# Altium PCB Ball_Dropper.PcbDoc
Units mil, origin at the board's own origin, x right, y up, seen from the top; angles counter-clockwise.
Board outline 6000 x 4000 mil, 2 copper layers (Top Layer, Bottom Layer); 79 components, 83 nets, 409 pads, 399 vias.
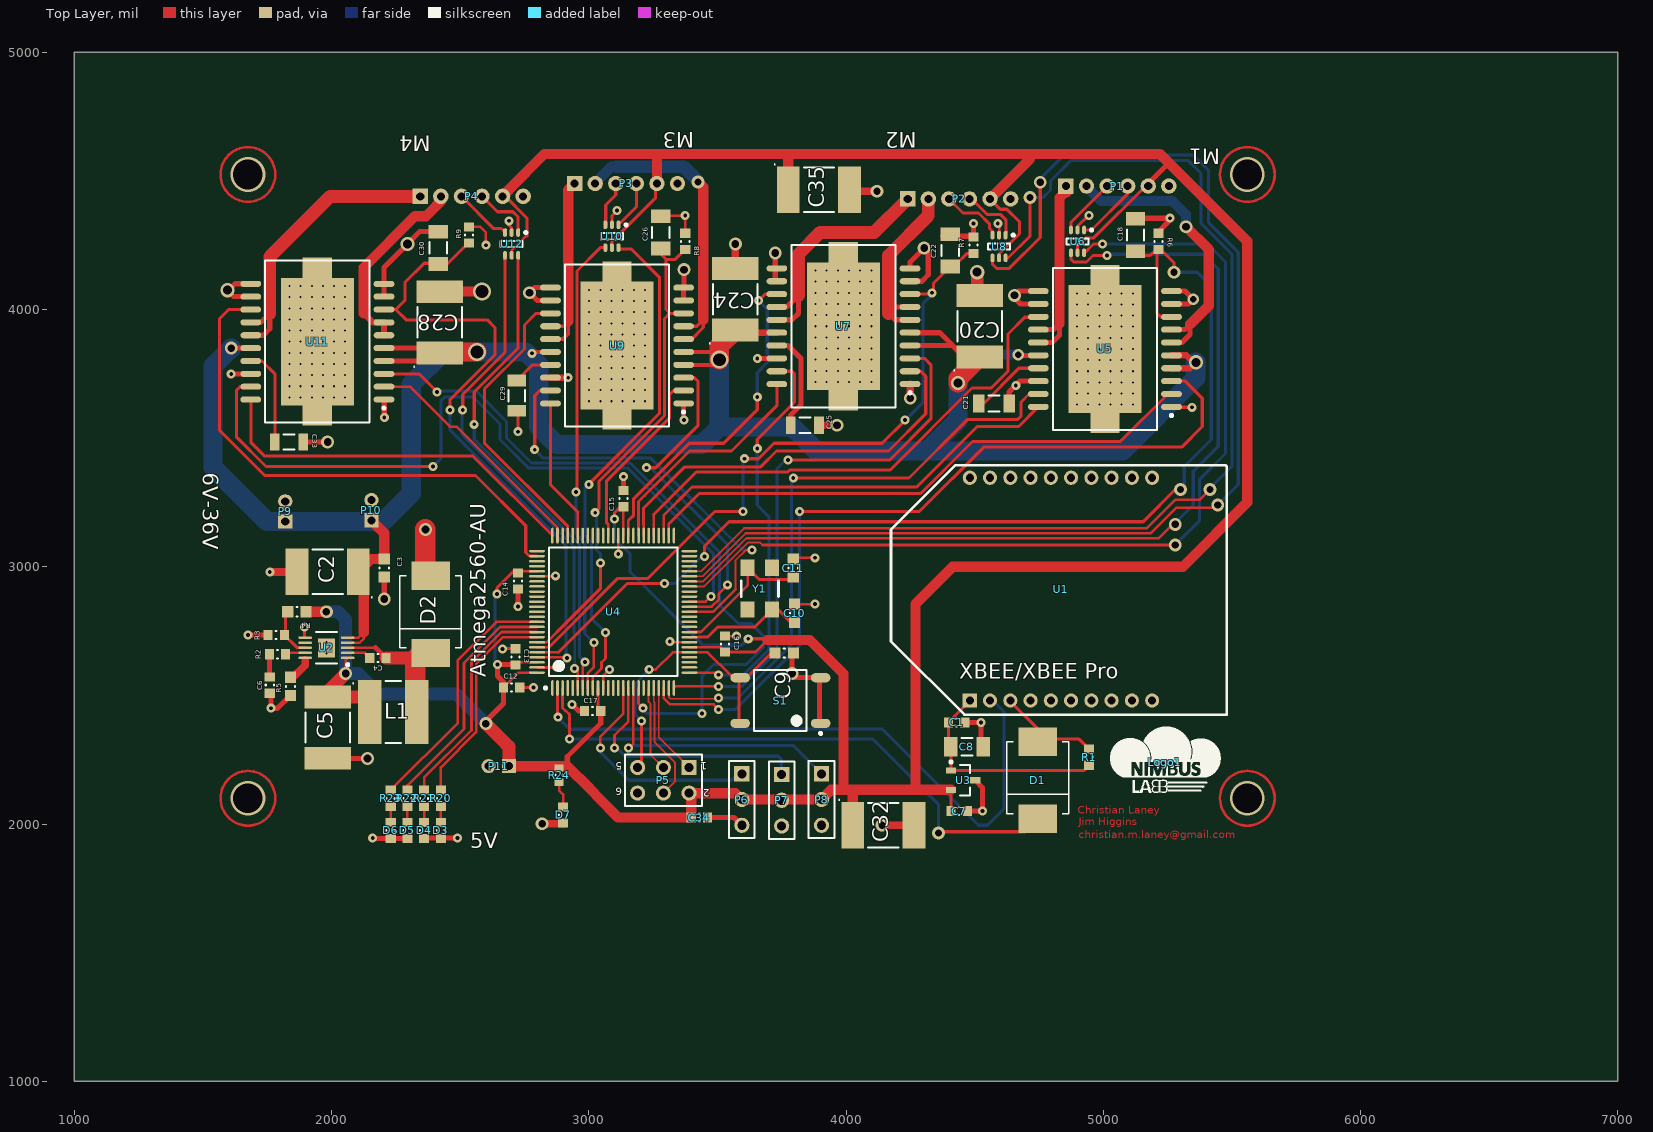
[diagram p0: Top Layer view]
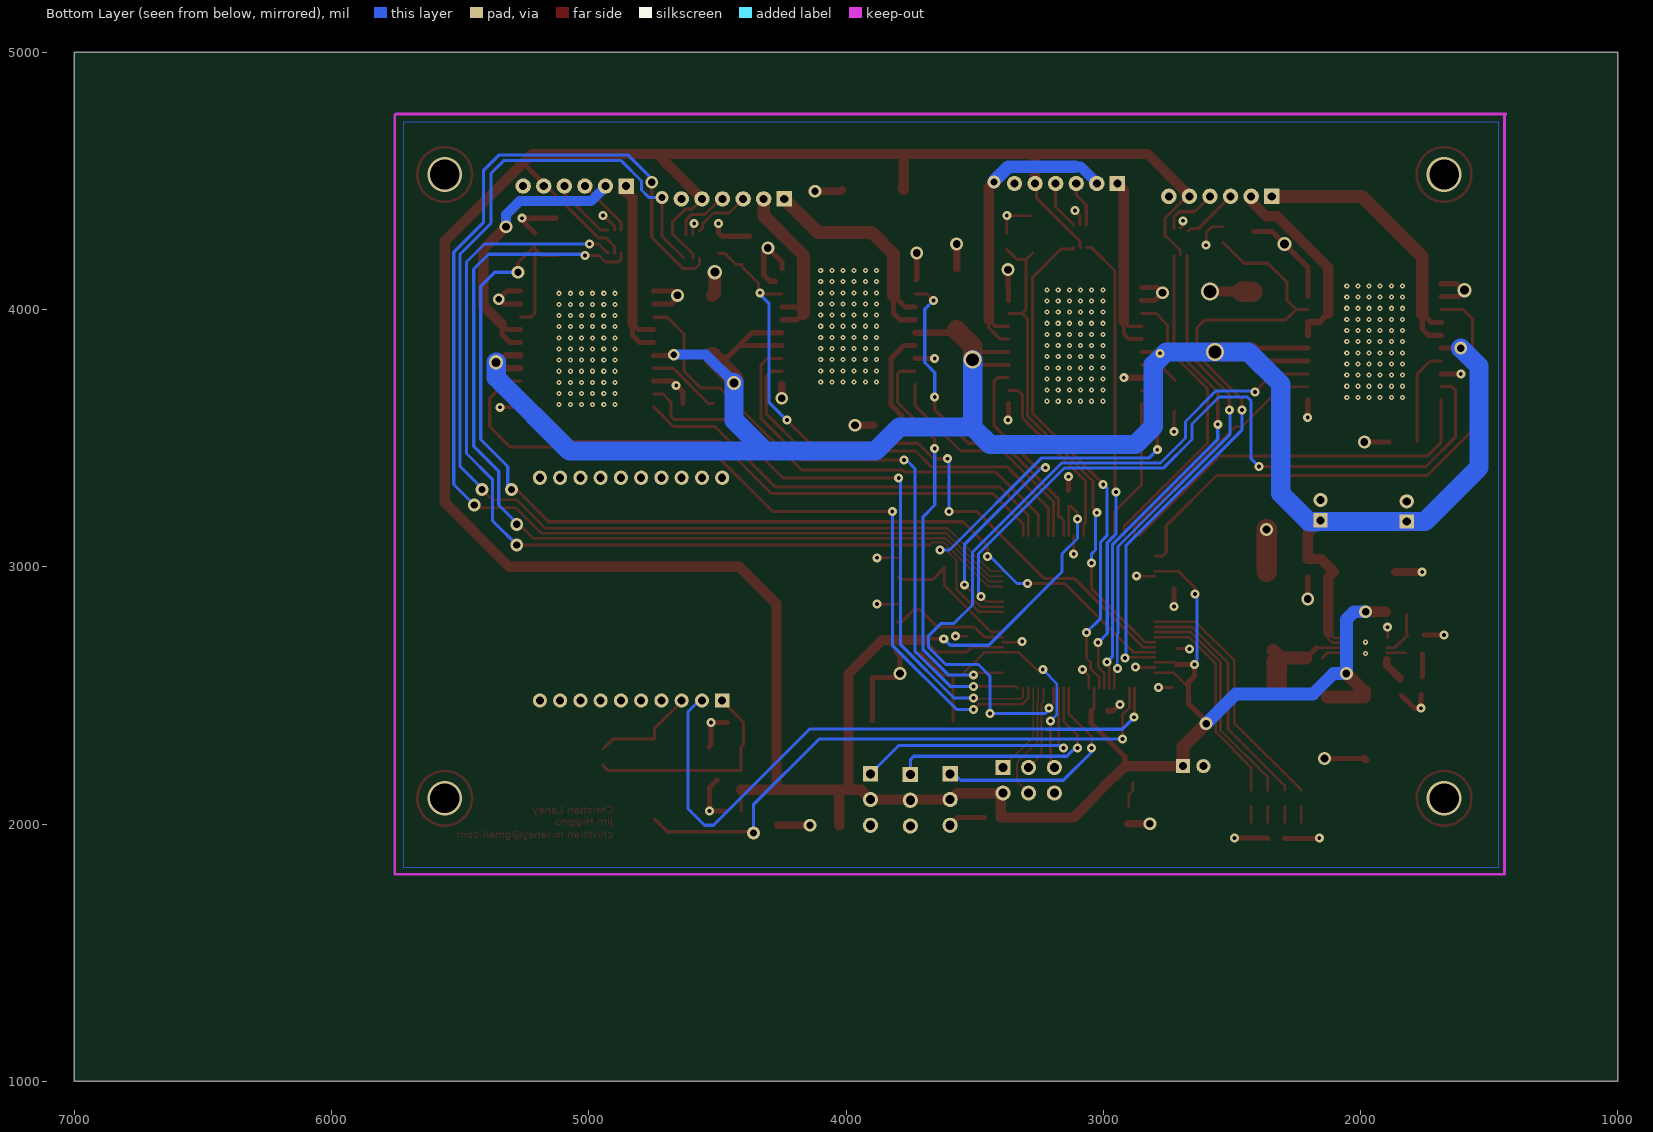
[diagram p1: Bottom Layer view, seen from below]

## Layer stack, top to bottom
Top Solder: solder mask 0.4, Solder Resist, Dk 3.5
Top Layer: signal copper 1.4
Dielectric 1: dielectric 12.6, FR-4, Dk 4.8
Bottom Layer: signal copper 1.4
Bottom Solder: solder mask 0.4, Solder Resist, Dk 3.5

## Board outline
1000,1000 7000,1000 7000,5000 1000,5000

## Design rules (kind name [scope] priority, off if disabled: settings)
Clearance [All] p1: gap=8
ComponentClearance [All] p1: gap=2 collisioncheckmode=3 verticalgap=2 showdistances=FALSE
HoleSize [All] p1: absolutevalues=TRUE maxlimit=150 minlimit=15 maxpercent=80.000 minpercent=20.000
HoleToHoleClearance [All] p1: gap=0 allowstackedmicrovias=TRUE
MinimumAnnularRing HBridgeMinimumAnnularRing [(InComponent('U5') OR InComponent('U7') OR InComponent('U9') OR InComponent('U11'))] p1: minimumring=3
MinimumAnnularRing [All] p2: minimumring=10
MinimumSolderMaskSliver [All] p1: minsoldermaskwidth=0
PolygonConnect HBridgeConnect [(InComponent('U5') OR InComponent('U7') OR InComponent('U9') OR InComponent('U11'))] p1: connectstyle=Direct reliefconductorwidth=10 reliefentries=4 polygonreliefangle="90 Angle" airgapwidth=10
PolygonConnect [All] p2: connectstyle=Relief reliefconductorwidth=10 reliefentries=4 polygonreliefangle="90 Angle" airgapwidth=10
RoutingTopology [All] p1 off: topology=Shortest
RoutingVias [All] p1: holewidth=12 width=25 viastyle="Through Hole" minholewidth=12 minwidth=20 maxholewidth=75 maxwidth=100
ShortCircuit [All] p1: allowed=TRUE
SilkToSilkClearance [All] p1: silktosilkclearance=0
SilkToSolderMaskClearance [IsPad] p1: minsilkscreentomaskgap=4 clearancetoexposedcopper=TRUE
SolderMaskExpansion [All] p1: expansion=4
UnpouredPolygon [All] p1: allowunpoured=FALSE
Width [All] p1: maxlimit=100 minlimit=7 preferedwidth=10 minimp=50.000000 maximp=50.000000 favimp=50.000000
21 further rules are at their usual default settings.

## Components (designator, comment, footprint, x,y, rotation, side; value= is the part's Value field where it differs from the comment)
C1 "CAP 100nF 10V 0603(1608)" CAPC0603(1608)100_N 4430,2395 r0 top
C2 "TantalumCap7343" TantalumCap7343 1985,2980 r180 top
C3 "CAP 10uF 10V 0603(1608)" CAPC0603(1608)100_M 2205,2995 r90 top
C4 "CAP 470nF 16V 0603(1608)" CAPC0603(1608)100_N 2180,2645 r0 top
C5 "TantalumCap7343" TantalumCap7343 1985,2375 r270 top
C6 "CAP 470pF 16V 0603(1608)" CAPC0603(1608)100_N 1760,2540 r90 top
C7 "CAP 470nF 10V 0603(1608)" CAPC0603(1608)100_N 4440,2050 r180 top
C8 "CAP 33uF 10V 1206(3216)" CAPC1206(3216)190_M 4470,2300 r180 top
C9 "CAP 10nF 10V 0603(1608)" CAPC0603(1608)100_M 3760,2665 r0 top
C10 "CAP 22pF 10V 0603(1608)" CAPC0603(1608)100_M 3800,2820 r270 top
C11 "CAP 22pF 10V 0603(1608)" CAPC0603(1608)100_M 3795,2995 r270 top
C12 "CAP 100nF 10V 0603(1608)" CAPC0603(1608)100_N 2700,2530 r180 top
C13 "CAP 100nF 10V 0603(1608)" CAPC0603(1608)100_N 2715,2650 r270 top
C14 "CAP 100nF 10V 0603(1608)" CAPC0603(1608)100_N 2725,2945 r90 top
C15 "CAP 100nF 10V 0603(1608)" CAPC0603(1608)100_N 3135,3265 r90 top
C16 "CAP 100nF 10V 0603(1608)" CAPC0603(1608)100_N 3530,2700 r270 top
C17 "CAP 100nF 10V 0603(1608)" CAPC0603(1608)100_N 3015,2440 r0 top
C18 "CAP 1uF 25V 1206(3216)" CAPC1206(3216)130_M 5125,4290 r270 top
C20 "TantalumCap7343" TantalumCap7343 4520,3935 r90 top
C21 "CAP 33nF 25V 1206(3216)" CAPC1206(3216)100_N 4575,3635 r180 top
C22 "CAP 1uF 25V 1206(3216)" CAPC1206(3216)130_M 4405,4230 r270 top
C24 "TantalumCap7343" TantalumCap7343 3570,4040 r90 top
C25 "CAP 33nF 25V 1206(3216)" CAPC1206(3216)100_L 3840,3550 r180 top
C26 "CAP 1uF 25V 1206(3216)" CAPC1206(3216)130_M 3280,4300 r270 top
C28 "TantalumCap7343" TantalumCap7343 2420,3950 r90 top
C29 "CAP 33nF 25V 1206(3216)" CAPC1206(3216)100_N 2720,3665 r90 top
C30 "CAP 1uF 25V 1206(3216)" CAPC1206(3216)130_M 2415,4240 r270 top
C32 "TantalumCap7343" TantalumCap7343 4145,1995 r0 top
C33 "CAP 33nF 25V 1206(3216)" CAPC1206(3216)100_L 1835,3485 r180 top
C34 "CAP 100nF 10V 0603(1608)" CAPC0603(1608)100_N 3430,2025 r0 top
C35 "TantalumCap7343" TantalumCap7343 3895,4465 r0 top
D1 "1N4148WT" DIODE_SMC 4745,2170 r90 top
D2 "BAT60A" DIODE_SMC 2385,2815 r90 top
D3 "LED0" CAPC0603(1608)55_N 2425,1975 r270 top
D4 "LED0" CAPC0603(1608)55_N 2360,1975 r270 top
D5 "LED0" CAPC0603(1608)55_N 2295,1975 r270 top
D6 "LED0" CAPC0603(1608)55_N 2230,1975 r270 top
D7 "LED0" CAPC0603(1608)55_N 2900,2035 r270 top
L1 "Inductor" TYS6045 2240,2435 r0 top
Logo1 "NIMBUS Logo" "NIMBUS Logo" 5240,2240 r0 top
P1 "Header 6" DF3A-6P-2DS 5055,4480 r0 top
P2 "Header 6" DF3A-6P-2DS 4440,4430 r0 top
P3 "Header 6" DF3A-6P-2DS 3145,4490 r0 top
P4 "Header 6" DF3A-6P-2DS 2545,4440 r0 top
P5 "ISP" HDR2X3 3390,2220 r180 top
P6 "Header 3" HDR1X3 3595,2195 r270 top
P7 "Header 3" HDR1X3 3750,2192.44 r270 top
P8 "Header 3" HDR1X3 3905,2195 r270 top
P9 "Header 2" DF3A-2P-2DS 1820,3215 r90 top
P10 "Header 2" DF3A-2P-2DS 2155,3220 r90 top
P11 "Header 2" DF3A-2P-2DS 2650,2225 r180 top
R1 "10K 5% 0603(1608)" RESC0603(1608)_N 4945,2260 r270 top
R2 "16K2 1% 0603(1608)" RESC0603(1608)_N 1790,2660 r0 top
R3 "100K 5% 0603(1608)" RESC0603(1608)_N 1785,2735 r0 top
R4 "536K 1% 0603(1608)" RESC0603(1608)_M 1865,2825 r0 top
R5 "40K2 1% 0603(1608)" RESC0603(1608)_M 1840,2535 r270 top
R6 "100R 5% 0603(1608)" RESC0603(1608)_N 5215,4265 r270 top
R7 "100R 5% 0603(1608)" RESC0603(1608)_N 4495,4250 r270 top
R8 "100R 5% 0603(1608)" RESC0603(1608)_N 3375,4265 r270 top
R9 "100R 5% 0603(1608)" RESC0603(1608)_N 2535,4290 r270 top
R20 "330R 5% 0603(1608)" RESC0603(1608)_N 2425,2100 r270 top
R21 "330R 5% 0603(1608)" RESC0603(1608)_N 2360,2100 r270 top
R22 "330R 5% 0603(1608)" RESC0603(1608)_N 2295,2100 r270 top
R23 "330R 5% 0603(1608)" RESC0603(1608)_N 2230,2100 r270 top
R24 "330R 5% 0603(1608)" RESC0603(1608)_L 2885,2190 r270 top
S1 "TactileSwitch" TactileSwitch 3745,2480 r180 top
U1 "XBEE/XBEE Pro" "XBEE PRO" 5190,2480 r90 top
U2 "LT3480EMSE#TRPBF" LT-MSE-10-EDP_L 1980,2685 r180 top
U3 "LM3480" LM3480 4455,2170 r0 top
U4 "Atmega2560-AU" 100T1_L 3095,2825 r90 top
U5 "33887 H-Bridge" MC33887 5006.65,3846.69 r180 top
U6 "NC7WZ14" NC7WZ14 4900,4265 r270 top
U7 "33887 H-Bridge" MC33887 3990,3935 r180 top
U8 "NC7WZ14" NC7WZ14 4595,4245 r270 top
U9 "33887 H-Bridge" MC33887 3110,3860 r180 top
U10 "NC7WZ14" NC7WZ14 3090,4285 r270 top
U11 "33887 H-Bridge" MC33887 1945,3875 r180 top
U12 "NC7WZ14" NC7WZ14 2700,4255 r270 top
Y1 "FQ5032B-20" FOX-FQ5032B_V 3665,2915 r90 top

## Footprints (in the part's own frame and the unit in brackets; to place one, negate y for a bottom-side part, rotate by r counter-clockwise, add the part's x,y. Pads: shape width x height; smd on the part's side, far side on the other; paste and mask are expansions set on the pad)
100T1_L [mm] "Thin QFP, 100-Leads, Body 14x14mm, Pitch 0.5mm, IPC High Density"
  oval 1.55x0.25 smd: 1(-7.525,6) 2(-7.525,5.5) 3(-7.525,5) 4(-7.525,4.5) 5(-7.525,4) 6(-7.525,3.5) 7(-7.525,3) 8(-7.525,2.5) 9(-7.525,2) 10(-7.525,1.5) 11(-7.525,1) 12(-7.525,0.5) 13(-7.525,0) 14(-7.525,-0.5) 15(-7.525,-1) 16(-7.525,-1.5) 17(-7.525,-2) 18(-7.525,-2.5) 19(-7.525,-3) 20(-7.525,-3.5) 21(-7.525,-4) 22(-7.525,-4.5) 23(-7.525,-5) 24(-7.525,-5.5) 25(-7.525,-6) 51(7.525,-6) 52(7.525,-5.5) 53(7.525,-5) 54(7.525,-4.5) 55(7.525,-4) 56(7.525,-3.5) 57(7.525,-3) 58(7.525,-2.5) 59(7.525,-2) 60(7.525,-1.5) 61(7.525,-1) 62(7.525,-0.5) 63(7.525,0) 64(7.525,0.5) 65(7.525,1) 66(7.525,1.5) 67(7.525,2) 68(7.525,2.5) 69(7.525,3) 70(7.525,3.5) 71(7.525,4) 72(7.525,4.5) 73(7.525,5) 74(7.525,5.5) 75(7.525,6)
  oval 0.25x1.55 smd: 26(-6,-7.525) 27(-5.5,-7.525) 28(-5,-7.525) 29(-4.5,-7.525) 30(-4,-7.525) 31(-3.5,-7.525) 32(-3,-7.525) 33(-2.5,-7.525) 34(-2,-7.525) 35(-1.5,-7.525) 36(-1,-7.525) 37(-0.5,-7.525) 38(0,-7.525) 39(0.5,-7.525) 40(1,-7.525) 41(1.5,-7.525) 42(2,-7.525) 43(2.5,-7.525) 44(3,-7.525) 45(3.5,-7.525) 46(4,-7.525) 47(4.5,-7.525) 48(5,-7.525) 49(5.5,-7.525) 50(6,-7.525) 76(6,7.525) 77(5.5,7.525) 78(5,7.525) 79(4.5,7.525) 80(4,7.525) 81(3.5,7.525) 82(3,7.525) 83(2.5,7.525) 84(2,7.525) 85(1.5,7.525) 86(1,7.525) 87(0.5,7.525) 88(0,7.525) 89(-0.5,7.525) 90(-1,7.525) 91(-1.5,7.525) 92(-2,7.525) 93(-2.5,7.525) 94(-3,7.525) 95(-3.5,7.525) 96(-4,7.525) 97(-4.5,7.525) 98(-5,7.525) 99(-5.5,7.525) 100(-6,7.525)
  silkscreen extent -7.65,-6.35 6.35,6.8, body extent -7,-7 7,7, height 1.6
CAPC0603(1608)55_N [mm] "Chip Capacitor, Body 1.6x0.8mm, Height 0.55mm, IPC Medium Density"
  rect 0.9x1 smd: 1(-0.8,0) 2(0.8,0)
  silkscreen extent -0.05,-0.4 0.05,0.4, body extent -0.87,-0.48 0.88,0.47, height 0.55
CAPC0603(1608)100_M [mm] "Chip Capacitor, Body 1.6x0.8mm, Height 1.0mm, IPC Low Density"
  rect 1.1x1.1 smd: 1(-0.9,0) 2(0.9,0)
  silkscreen extent -0.05,-0.45 0.05,0.45, body extent -0.87,-0.47 0.88,0.48, height 1
CAPC0603(1608)100_N [mm] "Chip Capacitor, Body 1.6x0.8mm, Height 1.0mm, IPC Medium Density"
  rect 0.9x1 smd: 1(-0.8,0) 2(0.8,0)
  silkscreen extent -0.05,-0.4 0.05,0.4, body extent -0.87,-0.48 0.88,0.47, height 1
CAPC1206(3216)100_L [mm] "Chip Capacitor, Body 3.2x1.6mm, Height 1mm, IPC High Density"
  rect 0.95x1.7 smd: 1(-1.4,0) 2(1.4,0)
  silkscreen extent -0.55,-0.75 0.55,0.75, body extent -1.7,-0.9 1.7,0.9, height 1
CAPC1206(3216)100_N [mm] "Chip Capacitor, Body 3.2x1.6mm, Height 1mm, IPC Medium Density"
  rect 1.15x1.8 smd: 1(-1.5,0) 2(1.5,0)
  silkscreen extent -0.55,-0.8 0.55,0.8, body extent -1.7,-0.9 1.7,0.9, height 1
CAPC1206(3216)130_M [mm] "Chip Capacitor, Body 3.2x1.6mm, Height 1.3mm, IPC Low Density"
  rect 1.35x1.9 smd: 1(-1.6,0) 2(1.6,0)
  silkscreen extent -0.55,-0.85 0.55,0.85, body extent -1.7,-0.9 1.7,0.9, height 1.3
CAPC1206(3216)190_M [mm] "Chip Capacitor, Body 3.2x1.6mm, Height 1.9mm, IPC Low Density"
  rect 1.35x1.9 smd: 1(-1.6,0) 2(1.6,0)
  silkscreen extent -0.55,-0.85 0.55,0.85, body extent -1.7,-0.9 1.7,0.9, height 1.9
DF3A-2P-2DS [mm] "Two terminal, Right Angle Connector"
  rect 1.4x1.4 hole 0.8: 1(-1,0)
  round 1.4 hole 0.8: 2(1,0)
  body extent -3.05,-1.5 3.05,5.7, height 5
DF3A-6P-2DS [mil]
  rect 60x60 hole 31.5: 1(-200,0)
  round 60 hole 31.5: 2(-120,0) 3(-40,0) 4(40,0) 5(120,0) 6(200,0)
  body extent -275,-75 277,150, height 197
DIODE_SMC [mil] "Diode; 2 Leads"
  rect 110x150 smd: 1(-150,0) 2(150,0)
  silkscreen extent -130,-120 150,120
FOX-FQ5032B_V [mil] "SMT Crystal, 4-Leads, Body 5.2x3.4mm"
  rect 63x55 smd: 1(-81.5,-47.5) 2(81.5,-47.5) 3(81.5,47.5) 4(-81.5,47.5)
  silkscreen extent -31,-72 31,72, body extent -114,-52 113,51, height 47
HDR1X3 [mm] "Connector; Header; 3 Position"
  rect 1.5x1.5 hole 0.9: 1(0,0)
  round 1.5 hole 0.9: 2(2.54,0) 3(5.08,0)
  silkscreen extent -1.27,-1.27 6.35,1.27
HDR2X3 [mm] "Connector; Header; 3x2 Position"
  rect 1.5x1.5 hole 0.9: 1(0,0)
  round 1.5 hole 0.9: 2(0,2.54) 3(2.54,0) 4(2.54,2.54) 5(5.08,0) 6(5.08,2.54)
  silkscreen extent -1.27,-1.27 6.35,3.81
LM3480 [mm] "SOT23, 3-Leads, Body 2.92x2.37mm, Pitch 0.95mm, IPC Medium Density"
  rect 1x0.6 smd: 1(-1.2,0.95) 2(-1.2,-0.95) 3(1.2,0)
  silkscreen extent -1.32,-1.5 0.7,1.92, body extent -0.7,-1.52 0.7,1.52, height 1.12
LT-MSE-10-EDP_L [mm] "SOP, 10-Leads, Body 3.1x3.1mm, Pitch 0.5mm, Thermal Pad 1.88x1.68mm, IPC High Density"
  oval 1.35x0.25 smd mask+0.082: 1(-2.1,1) 2(-2.1,0.5) 3(-2.1,0) 4(-2.1,-0.5) 5(-2.1,-1) 6(2.1,-1) 7(2.1,-0.5) 8(2.1,0) 9(2.1,0.5) 10(2.1,1)
  rect 1.68x1.88 smd mask+0.082: 11(0,0)
  silkscreen extent -2.23,-1.55 1.02,1.8, body extent -1.55,-1.55 1.55,1.55, height 1.1
MC33887 [mm] "SOP, 20-Leads, Body 15.90x11.00mm, Pitch 1.27mm, Thermal Pad 12.60x7.20mm, IPC Medium Density"
  oval 2.05x0.6 smd: 1(-6.575,5.715) 2(-6.575,4.445) 3(-6.575,3.175) 4(-6.575,1.905) 5(-6.575,0.635) 6(-6.575,-0.635) 7(-6.575,-1.905) 8(-6.575,-3.175) 9(-6.575,-4.445) 10(-6.575,-5.715) 11(6.575,-5.715) 12(6.575,-4.445) 13(6.575,-3.175) 14(6.575,-1.905) 15(6.575,-0.635) 16(6.575,0.635) 17(6.575,1.905) 18(6.575,3.175) 19(6.575,4.445) 20(6.575,5.715)
  rect 2.9x2 smd: 21(0,7.3) 21(0,-7.3)
  rect 7.2x12.6 smd: 21(0,0)
  silkscreen extent -6.7,-8 5.15,8, body extent -5.55,-8 5.55,8, height 3.4
NC7WZ14 [mm] "TinyLogic Dual Inverter with Schmitt trigger inputs, IPC Compliant"
  oval 0.85x0.4 smd: 1(-1.125,0.65) 2(-1.125,0) 3(-1.125,-0.65) 4(1.125,-0.65) 5(1.125,0) 6(1.125,0.65)
  silkscreen extent -1.25,-1.1 0.3,1.53, body extent -0.7,-1.1 0.7,1.1, height 1
"NIMBUS Logo" [mil] "NIMBUS Logo Silkscreen"
  silkscreen extent -213,-119 217,138
RESC0603(1608)_L [mm] "Chip Resistor, Body 1.6x0.8mm, IPC High Density"
  rect 0.7x0.9 smd: 1(-0.7,0) 2(0.7,0)
  silkscreen extent -0.05,-0.35 0.05,0.35, body extent -0.85,-0.47 0.85,0.47, height 0.6
RESC0603(1608)_M [mm] "Chip Resistor, Body 1.6x0.8mm, IPC Low Density"
  rect 1.1x1.1 smd: 1(-0.9,0) 2(0.9,0)
  silkscreen extent -0.05,-0.45 0.05,0.45, body extent -0.85,-0.47 0.85,0.47, height 0.6
RESC0603(1608)_N [mm] "Chip Resistor, Body 1.6x0.8mm, IPC Medium Density"
  rect 0.9x1 smd: 1(-0.8,0) 2(0.8,0)
  silkscreen extent -0.05,-0.4 0.05,0.4, body extent -0.85,-0.47 0.85,0.47, height 0.6
TactileSwitch [mm] "SOP, 4-Leads, Body 6.00x6.00mm, Pitch 4.50mm, IPC Medium Density"
  oval 1.95x0.9 smd: 1(-3.975,2.25) 2(-3.975,-2.25) 3(3.975,-2.25) 4(3.975,2.25)
  silkscreen extent -4.1,-3 2.6,3.37, body extent -3,-3 3,3, height 4.4
TantalumCap7343 [mm]
  rect 2.25x4.6 smd: 1(-3.025,0) 2(3.025,0)
  silkscreen extent -4.41,-2.2 1.5,2.56, body extent -3.8,-2.3 3.8,2.3, height 1.5
TYS6045 [mm] "Chip Inductor, 2-Leads, Body 6.00x6.00mm, IPC Medium Density"
  rect 2.36x6.32 smd: 1(-2.32,0) 2(2.32,0)
  silkscreen extent -0.75,-3.06 0.75,3.06, body extent -3.15,-3.15 3.15,3.15, height 4.5
"XBEE PRO" [mm] "XBEE PRO"
  rect 1.4x1.4 hole 0.8: 1(0,18)
  round 1.4 hole 0.8: 2(0,16) 3(0,14) 4(0,12) 5(0,10) 6(0,8) 7(0,6) 8(0,4) 9(0,2) 10(0,0) 11(22,0) 12(22,2) 13(22,4) 14(22,6) 15(22,8) 16(22,10) 17(22,12) 18(22,14) 19(22,16) 20(22,18)
  body extent -1.19,-7.37 23.19,25.61, height 2.79

## Part data
C1 C12 C13 C14 C15 C16 C17 C34: library part CMP-1035-02582-1, "CAP 100nF 10V -20% to +80% 0603 (1608 Metric) Thickness 1mm SMD"
C2: "100uF"
C3: library part CMP-1035-02800-1, "CAP 10uF 10V ±20% 0603 (1608 Metric) Thickness 1mm SMD"
C4: library part CMP-1035-02701-1, "CAP 470nF 16V ±20% 0603 (1608 Metric) Thickness 1mm SMD"
C5 C20 C24 C28 C32 C35: "47uF"
C6: library part CMP-1035-01664-1, "CAP 470pF 16V ±2% 0603 (1608 Metric) Thickness 1mm SMD"
C7: library part CMP-1035-02696-1, "CAP 470nF 10V ±10% 0603 (1608 Metric) Thickness 1mm SMD"
C8: library part CMP-1037-04997-1, "CAP 33uF 10V ±20% 1206 (3216 Metric) Thickness 1.9mm SMD"
C9: library part CMP-1035-02304-1, "CAP 10nF 10V ±2% 0603 (1608 Metric) Thickness 1mm SMD"
C10 C11: library part CMP-1035-00797-1, "CAP 22pF 10V ±0.25pF 0603 (1608 Metric) Thickness 1mm SMD"
C18 C22 C26 C30: library part CMP-1037-04697-1, "CAP 1uF 25V ±5% 1206 (3216 Metric) Thickness 1.3mm SMD"
C21: library part CMP-1037-03874-1, "CAP 33nF 25V ±20% 1206 (3216 Metric) Thickness 1mm SMD"
C25 C29 C33: library part CMP-1037-03869-1, "CAP 33nF 25V ±1% 1206 (3216 Metric) Thickness 1mm SMD"
D1: library part CMP-0881-00001-1, "High Conductance Fast Switching Diode, 75 V, -55 to 150 degC, 2-Pin SOD523F, RoHS"
D2: library part CMP-1183-00008-1, "Silicon Schottky Diode, -55 to 85 degC, SOD323, Reel, Green"
D3 D4 D5 D6 D7: "Typical INFRARED GaAs LED"
P1 P2 P3 P4: "Header, 6-Pin"
P5: library part "Header 3X2", "Header, 3-Pin, Dual row"
P6 P7 P8: "Header, 3-Pin"
P9 P10 P11: "Header, 2-Pin"
R1: library part CMP-1012-00098-1, "10K 0.1W 5% 0603 (1608 Metric)  SMD"
R2: library part CMP-1012-00645-1, "16K2 0.1W 1% 0603 (1608 Metric)  SMD"
R3: library part CMP-1012-00122-1, "100K 0.1W 5% 0603 (1608 Metric)  SMD"
R4: library part CMP-1012-00819-1, "536K 0.1W 1% 0603 (1608 Metric)  SMD"
R5: library part CMP-1012-00691-1, "40K2 0.1W 1% 0603 (1608 Metric)  SMD"
R6 R7 R8 R9: library part CMP-1012-00050-1, "100R 0.1W 5% 0603 (1608 Metric)  SMD"
R20 R21 R22 R23 R24: library part CMP-1012-00062-1, "330R 0.1W 5% 0603 (1608 Metric)  SMD"
S1: "CKN9087CT-ND"
U1: library part "Xbee Pro"
U2: library part CMP-0491-01005-1, "2 A, 2.4 MHz Step-Down Switching Regulator with 70 uA Quiescent Current, 10-pin SOP (MSE-10-EDP), -40 to 85 degC, Pb-Free, Tape and Reel"
U3: "LM3480IM3-3.3/NOPBCT-ND"
U4: "ATMEGA2560-16AURCT-ND"
U5 U7 U9 U11: library part "33887 H Bridge", "MC33887APVWR2CT-ND"
U6 U8 U10 U12: "NC7WZ14P6XCT-ND"
Y1: library part CMP-0399-00002-1, "Crystal Oscillator, SMD, 20MHz, Stab=30ppm 20.0pF"

## Via types
v1: diameter 19.68, hole 7.87, Top Layer to Bottom Layer, 266 vias
v2: diameter 35, hole 15, Top Layer to Bottom Layer, 51 vias
v3: diameter 35, hole 15, Top Layer to Bottom Layer, tented both sides, 37 vias
v4: diameter 50, hole 30, Top Layer to Bottom Layer, 18 vias
v5: diameter 50, hole 28, Top Layer to Bottom Layer, 13 vias
v6: diameter 55, hole 35, Top Layer to Bottom Layer, 5 vias
v7: diameter 135, hole 115, Top Layer to Bottom Layer, 4 vias
v8: diameter 70, hole 50, Top Layer to Bottom Layer, 3 vias
v9: diameter 45, hole 25, Top Layer to Bottom Layer, 2 vias

## Nets (pads, with @x,y where several pads share a name; then routed paths per layer and width w, separated by ;. In a path a pad name is that pad's centre, name@x,y a point inside that pad or via, vN(x,y) a via of type N, cw(c..) or ccw(c..) an arc to the next point about the centre after c; other vN are vias at no path point)
3.3V: C1.1 C8.2 R1.2 U1.1 U3.1 | length 857.6
  Top Layer w12: U1.1@4483.5,2480 C1.1 4398.5,2308.5 C8.2 4407.76,2299.25 U3.1 4923.9,2207.4 R1.2
5V: C5.1 C7.2 C12.2 C13.2 C14.2 C15.1 C16.2 C17.2 C32.1 C34.1 C35.1 L1.1 P1.5 P2.5 P3.5 P4.5 P5.2 P6.2 P7.2 P8.2 P11.1 R4.2 R24.1 U2.1 U3.2 U4.10 U4.31 U4.61 U4.80 U4.98 U4.100 U6.5 U8.5 U10.5 U12.5 | length 15613
  Top Layer w10: v4(2055,2585) 2055,2637.95 U2.1 ; C12.2 2727.28,2588.78 U4.100 ; U12.5 2700,4230 2755.71,4285.71 2760,4285.71 ; C14.2@2707.48,2982.48 U4.80 ; C13.2@2724.65,2628.15 U4.98 ; U4.10 3035.94,2450.55 C17.2 ; U4.61 3134.37,3232.87 C15.1 ; U4.31 3511.3,2687.2
  Top Layer w12: v2(2643,2894.5) 2643,2918 C14.2@2707.48,2982.48 ; P4.5 2675,4440 2760,4355 2760,4285.71 ; C13.2 C13.2@2724.65,2628.15 ; 3000,2131.52 3005,2136.52 ; U10.5@3088.28,4242.43 U10.5 3090,4265 3123.56,4298.56 3124.65,4298.56 3260,4433.91 P3.5@3260,4475 ; v3(3100,3185) 3100,3210 3123.5,3233.5 C15.1 ; 3511.3,2687.2 C16.2 3648.5,2668.5 3695,2715 3690,2720 v3(3620,2720) ; U3.2 4407.76,2050.75 C7.2 ; P2.5 4600,4390 4625,4390 4675,4340 4675,4295.71 4595,4215.71 U8.5 ; U6.5@4898.28,4220.71 U6.5 4900,4245 4933.56,4278.56 4963.56,4278.56 P1.5@5170,4485
  Top Layer w20: v4(2600,2390) 2600,2400 2668.5,2468.5 C12.2 2668.5,2551.5 2645,2575 v2(2645,2620) 2713.5,2620 C13.2 ; 2660,2330 2668.5,2338.5 ; 2916.52,2225 2916.52,2261.52 3046.5,2391.5 C17.2 ; P1.5 5175,4490 5240,4555
  Top Layer w40: R4.2 v4(1980,2825) ; P4.5 2687,4462 2687,4464.02 2827.98,4605 3265,4605 ; P11.1 2916.52,2225 3005,2136.52 3046.5,2092.98 ; 3035.94,2104.06 3115,2025 C34.1@3395,2025 ; P3.5 3265,4605 ; C34.1 3398.5,2111.5 P5.2 3570,2120 P6.2 P8.2 3942.6,2132.6 3990,2132.6 ; 3695,2715 3860,2715 3990,2585 3990,2132.6 ; 3775.91,4604.09 C35.1 C35.1@3780,4469.09 ; C32.1 4025.91,2131.69 4025,2132.6 ; 4362.76,2132.6 4315,2132.6 ; U3.2 4315,2132.6 ; P2.5 4715,4585 ; 3265,4605 5220,4605 5560,4265 5560,3250 5310,3000 4415,3000 4270,2855 4270,2132.6 ; 3990,2132.6 4025,2132.6 ; 4025,2132.6 4270,2132.6 ; 4270,2132.6 4315,2132.6
  Top Layer w50: v4(2055,2585) 1985,2515 C5.1 L1.1@2127.76,2494.09 ; v4(2600,2390) 2660,2330 2689.37,2300.63 P11.1
  Bottom Layer w12: v2(2643,2894.5) 2635,2886.5 2635,2630 v2(2645,2620) ; v3(3100,3185) 3100,3110 3160,3050 3160,2980 3445,2695 3595,2695 v3(3620,2720)
  Bottom Layer w50: v4(1980,2825) 2025,2825 2055,2795 v4(2055,2585) 2105,2585 2185,2505 2485,2505 v4(2600,2390)
GND: C1.2 C2.2 C3.1 C5.2 C6.1 C7.1 C8.1 C9.2 C10.1 C11.1 C12.1 C13.1 C14.1 C15.2 C16.1 C17.1 C18.1 C20.2 C21.1 C22.1 C24.2 C25.1 C26.1 C28.2 C29.1 C30.1 C32.2 C33.1 C34.2 C35.2 D2.2 D3.2 D4.2 D5.2 D6.2 D7.2 P1.6 P2.6 P3.6 P4.6 P5.6 P6.3 P7.3 P8.3 P9.2 P10.2 P11.2 R3.1 R5.2 R6.1 R7.1 R8.1 R9.1 S1.1 S1.2 U1.10 U2.6 U2.11 U3.3 U4.11 U4.32 U4.62 U4.81 U4.99 U5.1 U5.9 U5.10 U5.11 U5.12 U5.18 U5.21 U6.2 U7.1 U7.9 U7.10 U7.11 U7.12 U7.18 U7.21 U8.2 U9.1 U9.9 U9.10 U9.11 U9.12 U9.18 U9.21 U10.2 U11.1 U11.9 U11.10 U11.11 U11.12 U11.18 U11.21 U12.2 | length 6992.9
  Top Layer w10: U2.6@1895,2724.37 v3(1895,2765) ; R9.1 2578.5,4321.5 2600,4300 v2(2600,4250) ; C29.1 2725,3600.94 v2(2725,3525) ; U4.99 v3@2873.46,2608.46 ; U4.81 2867.8,2962.8 v3(2870,2965) ; U4.11 3055.63,2575.63 v3(3080,2600) v3@3070,2600 ; v2@3114.68,3045.32 3115,3045 3114.68,3044.68 U4.62 ; C26.1@3282.01,4365 v2(3375,4365) R8.1 ; v3(3315,2710) 3325,2710 3328.11,2706.89 U4.32 ; C16.1@3531.5,2730 v3(3575,2730) ; U7.12@3725,4116.14 U7.12 ; C11.1@3799.57,3035 v2(3880,3035) ; C10.1@3800.43,2855 v2(3880,2855) ; v3(4590,4335) 4595,4330 U8.2 ; U5.1 5283.31,3621.69 U5.1@5285,3620
  Top Layer w12: v3(2665,2680) 2666.5,2681.5 C13.1 ; v2(2690,4345) 2690,4326.98 2700,4316.98 U12.2@2700,4314.29 ; C12.1 v3(2785,2530) ; v3@2873.46,2608.46 v3(2875,2610) ; U10.2 3090,4365 v2(3110,4385) ; U6.2 4900,4323.49 4941.51,4365 v2(4945,4365)
  Top Layer w15: U5.1@5285,3620 v2(5345,3620)
  Top Layer w20: v2(1610,3750) U11.18 ; v2(1675,2735) R3.1 ; U11.12 1620,4050 v6(1595,4075) 1600,4075 1625,4100 U11.11 ; C6.1@1765,2503.5 v2(1765,2450) 1790.43,2450 R5.2 ; C33.1 v4(1985,3485) ; C5.2 1985.91,2255 v4(2140,2255) ; v2(2160,1945) 2161.5,1943.5 D6.2 D5.2 ; U11.1 2205,3648.86 v2(2205,3580) ; U11.9 U11.10 2203.86,4163.86 v6(2295,4255) 2342.99,4302.99 C30.1 ; v4(2205,2875) C3.1 ; D4.2 2361.5,1945 v2(2490,1945) ; v2(2725,2845) C14.1 ; U9.18@2825.12,3735 U9.18 ; U9.12 2800,4035 v4(2770,4065) 2790,4085 U9.11 ; v3(2935,2465) 2960,2440 C17.1 ; C15.2 v2(3135,3350) ; U9.1 3368.86,3571.14 v2(3370,3570) ; U9.9 U9.10 3370,4086.14 v4(3370,4155) ; C34.2 3565,2025 P6.3 ; v2(3655,3810) U7.18 ; U7.12@3725,4116.14 v4(3725,4220) ; C9.2@3805.08,2670 3790,2654.92 v4(3790,2585) 3805,2570 S1.2@3887.91,2570 ; S1.1@3896.5,2401.42 S1.2@3896.5,2568.58 ; U7.10 4248.86,4183.86 v4(4303.86,4238.86) 4320,4222.72 4320,4135 4295,4110 U7.9@4275,4110 ; C22.1@4375,4285.12 4482.56,4285.12 4495,4297.56 v2(4495,4335) ; C1.2 v2(4525,2395) 4525,2307.99 C8.1 ; C7.1 v2(4530,2050) 4530,2142.24 U3.3 ; C21.1 4634.06,3679.06 4676.69,3721.69 U5.18 ; v4(4655,4055) 4671.69,4071.69 U5.11 ; v4@4665,4035 4678.31,4021.69 U5.12 ; C18.1@5127.01,4355 v2(5260,4355) 5260,4347.56 R6.1@5210,4297.56 ; U5.9 5331.69,4021.69 v9(5350,4040) 5318.31,4071.69 U5.10
  Top Layer w25: U9.18 v3(2920,3735)
  Top Layer w30: v2(1760,2980) C2.2 ; C5.2@1979.09,2250 C5.2 ; v5(2818.9,2001.1) D7.2@2905,2001.1 ; C24.2 v4(3570,4255) ; C25.1 v4(3965,3550) ; C35.2 4019.09,4460 v5(4120,4460) ; v5(4140,1995) C32.2 ; v4(4250,3655) U7.1@4250,3708.86
  Top Layer w40: C28.2 2420.91,4070 v8(2585,4070)
  Top Layer w50: v6(4510,4145) 4510,4064.09 C20.2
  Top Layer w80: D2.2@2365,2980 v4(2365,3145) ; C28.2 C28.2@2459.09,4069.09
  Bottom Layer w20: v4(3790,2585) 3795,2585 v4@3800,2590
  other v1: 1980,2663.35 1980,2706.65 4898.39,3630.16 4941.69,3630.16 4985,3630.16 5028.31,3630.16 5071.61,3630.16 5114.92,3630.16 3001.73,3643.46 3045.04,3643.46 3088.35,3643.46 3131.65,3643.46 3174.96,3643.46 3218.27,3643.46 1836.73,3658.46 1880.04,3658.46 1923.35,3658.46 1966.65,3658.46 2009.96,3658.46 2053.27,3658.46 4898.39,3673.46 4941.69,3673.46 4985,3673.46 5028.31,3673.46 5071.61,3673.46 5114.92,3673.46 3001.73,3686.77 3045.04,3686.77 3088.35,3686.77 3131.65,3686.77 3174.96,3686.77 3218.27,3686.77 1836.73,3701.77 1880.04,3701.77 1923.35,3701.77 1966.65,3701.77 2009.96,3701.77 2053.27,3701.77 4898.39,3716.77 4941.69,3716.77 4985,3716.77 5028.31,3716.77 5071.61,3716.77 5114.92,3716.77 3881.73,3718.46 3925.04,3718.46 3968.35,3718.46 4011.65,3718.46 4054.96,3718.46 4098.27,3718.46 3001.73,3730.08 3045.04,3730.08 3088.35,3730.08 3131.65,3730.08 3174.96,3730.08 3218.27,3730.08 1836.73,3745.08 1880.04,3745.08 1923.35,3745.08 1966.65,3745.08 2009.96,3745.08 2053.27,3745.08 4898.39,3760.08 4941.69,3760.08 4985,3760.08 5028.31,3760.08 5071.61,3760.08 5114.92,3760.08 3881.73,3761.77 3925.04,3761.77 3968.35,3761.77 4011.65,3761.77 4054.96,3761.77 4098.27,3761.77 3001.73,3773.39 3045.04,3773.39 3088.35,3773.39 3131.65,3773.39 3174.96,3773.39 3218.27,3773.39 1836.73,3788.39 1880.04,3788.39 1923.35,3788.39 1966.65,3788.39 2009.96,3788.39 2053.27,3788.39 4898.39,3803.39 4941.69,3803.39 4985,3803.39 5028.31,3803.39 5071.61,3803.39 5114.92,3803.39 3881.73,3805.08 3925.04,3805.08 3968.35,3805.08 4011.65,3805.08 4054.96,3805.08 4098.27,3805.08 3001.73,3816.69 3045.04,3816.69 3088.35,3816.69 3131.65,3816.69 3174.96,3816.69 3218.27,3816.69 1836.73,3831.69 1880.04,3831.69 1923.35,3831.69 1966.65,3831.69 2009.96,3831.69 2053.27,3831.69 4898.39,3846.69 4941.69,3846.69 4985,3846.69 5028.31,3846.69 5071.61,3846.69 5114.92,3846.69 3881.73,3848.39 3925.04,3848.39 3968.35,3848.39 4011.65,3848.39 4054.96,3848.39 4098.27,3848.39 3001.73,3860 3045.04,3860 3088.35,3860 3131.65,3860 3174.96,3860 3218.27,3860 1836.73,3875 1880.04,3875 1923.35,3875 1966.65,3875 2009.96,3875 2053.27,3875 4898.39,3890 4941.69,3890 4985,3890 5028.31,3890 5071.61,3890 5114.92,3890 3881.73,3891.69 3925.04,3891.69 3968.35,3891.69 4011.65,3891.69 4054.96,3891.69 4098.27,3891.69 3001.73,3903.31 3045.04,3903.31 3088.35,3903.31 3131.65,3903.31 3174.96,3903.31 3218.27,3903.31 1836.73,3918.31 1880.04,3918.31 1923.35,3918.31 1966.65,3918.31 2009.96,3918.31 2053.27,3918.31 4898.39,3933.31 4941.69,3933.31 4985,3933.31 5028.31,3933.31 5071.61,3933.31 5114.92,3933.31 3881.73,3935 3925.04,3935 3968.35,3935 4011.65,3935 4054.96,3935 4098.27,3935 3001.73,3946.61 3045.04,3946.61 3088.35,3946.61 3131.65,3946.61 3174.96,3946.61 3218.27,3946.61 1836.73,3961.61 1880.04,3961.61 1923.35,3961.61 1966.65,3961.61 2009.96,3961.61 2053.27,3961.61 4898.39,3976.61 4941.69,3976.61 4985,3976.61 5028.31,3976.61 5071.61,3976.61 5114.92,3976.61 3881.73,3978.31 3925.04,3978.31 3968.35,3978.31 4011.65,3978.31 4054.96,3978.31 4098.27,3978.31 3001.73,3989.92 3045.04,3989.92 3088.35,3989.92 3131.65,3989.92 3174.96,3989.92 3218.27,3989.92 1836.73,4004.92 1880.04,4004.92 1923.35,4004.92 1966.65,4004.92 2009.96,4004.92 2053.27,4004.92 4898.39,4019.92 4941.69,4019.92 4985,4019.92 5028.31,4019.92 5071.61,4019.92 5114.92,4019.92 3881.73,4021.61 3925.04,4021.61 3968.35,4021.61 4011.65,4021.61 4054.96,4021.61 4098.27,4021.61 3001.73,4033.23 3045.04,4033.23 3088.35,4033.23 3131.65,4033.23 3174.96,4033.23 3218.27,4033.23 1836.73,4048.23 1880.04,4048.23 1923.35,4048.23 1966.65,4048.23 2009.96,4048.23 2053.27,4048.23 4898.39,4063.23 4941.69,4063.23 4985,4063.23 5028.31,4063.23 5071.61,4063.23 5114.92,4063.23 3881.73,4064.92 3925.04,4064.92 3968.35,4064.92 4011.65,4064.92 4054.96,4064.92 4098.27,4064.92 3001.73,4076.54 3045.04,4076.54 3088.35,4076.54 3131.65,4076.54 3174.96,4076.54 3218.27,4076.54 1836.73,4091.54 1880.04,4091.54 1923.35,4091.54 1966.65,4091.54 2009.96,4091.54 2053.27,4091.54 3881.73,4108.23 3925.04,4108.23 3968.35,4108.23 4011.65,4108.23 4054.96,4108.23 4098.27,4108.23 3881.73,4151.54 3925.04,4151.54 3968.35,4151.54 4011.65,4151.54 4054.96,4151.54 4098.27,4151.54
  other v2: 3114.68,3050 4660,3705
  other v7: 1675,2100 5560,2100 1675,4525 5560,4525
INT0: U4.43 U6.6 | length 3739.3
  Top Layer w7: U4.43 3448.43,2923.43 3448.43,2923.9 3618.52,3094 3666,3094 3675,3085
  Top Layer w12: 3675,3085 v5(5280,3085) ; U6.6 4927.74,4220.71 4962.03,4255 v2(4997.5,4255)
  Bottom Layer w12: v2@4995,4255 5405,4255 5475,4185 5475,3440 5375,3340 5375,3180 v5(5280,3085)
INT1: U4.44 U6.4 | length 3677.4
  Top Layer w7: U4.44 3444.32,2943.11 3610.61,3109.39
  Top Layer w10: 3613.83,3110.5 5215.5,3110.5 v5@5270,3165
  Top Layer w12: U6.4 4874.41,4195.59 4885,4185 4935,4185 4960,4210 v2(5015,4210) ; v5@5270,3165 v5(5280,3165)
  Bottom Layer w12: v2(5015,4210) 5020,4215 5390,4215 5447.17,4157.83 5447.17,3468.63 5350,3371.46 5350,3240 5280,3170 v5(5280,3165)
INT2: U4.45 U8.4 | length 4762.2
  Top Layer w7: U4.45 3442.8,2962.8 3610,3130
  Top Layer w10: 3610,3130 5184,3130 5284,3230 v5@5435,3230
  Top Layer w12: U8.4 4569.41,4175.59 4585,4160 4635,4160 4755,4280 v5(4755,4495) ; v5@5435,3230 v5(5445,3240)
  Bottom Layer w12: v5(4755,4495) 4755,4508 4847,4600 5350,4600 5410,4540 5410,4337.58 5525,4222.58 5525,3320 v5(5445,3240)
INT3: U4.46 U8.6 | length 4504.2
  Top Layer w7: U4.46 3437.48,2982.48 3604.54,3149.54
  Top Layer w10: 3604.54,3149.54 3604.54,3150 5169.54,3150 5279.54,3260 5375,3260 v5(5415,3300)
  Top Layer w12: 4630,4200 4715,4285 v5(4715,4435)
  Bottom Layer w12: v5(4715,4435) 4765,4435 4795,4465 4795,4499.8 4874.2,4579 5330.54,4579 5380,4529.54 5380,4335.91 5500,4215.91 5500,3390 v5@5412.5,3302.5
INT4: U4.8 U10.4 | length 1809.3
  Top Layer w10: U4.8 2996.57,2586.57 3020,2610 v3(3020,2705)
  Top Layer w12: v2(2950,3290) 2954,3294 2954,4149.46 3045.25,4240.71 U10.4
  Bottom Layer w12: v2(2950,3290) 2950,3128.08 2984.5,3093.58 2984.5,2740.5 v3(3020,2705)
INT5: U4.9 U10.6 | length 1979.8
  Top Layer w10: U4.9 3016.26,2571.26 3049.5,2604.5 3049.5,2628.13 3065,2643.63 v3(3065,2745)
  Top Layer w12: v2(3000,3320) 3000,3321.12 3274.5,3595.62 3274.5,4125.5 3165.01,4234.99 3115.59,4234.99 U10.6
  Bottom Layer w12: v2(3000,3320) 2998.88,3320 2986,3307.12 2986,3120.37 3010,3096.37 3010,2800 v3(3065,2745)
INT6: U4.7 U12.6 | length 1934.3
  Top Layer w10: U4.7 v3@2976.89,2621.89
  Top Layer w12: v2(2554.66,3554) 2554.66,3679.66 2725.59,3850.59 U12.6 ; v3@2976.89,2621.89 v3(2985,2630)
  Bottom Layer w12: v2(2554.66,3554) 2554.66,3495.14 2964.5,3085.3 2964.5,2714.61 ; 2964.61,2714.61 2964.61,2650.39 v3(2985,2630)
INT7: U4.6 U12.4 | length 1937
  Top Layer w10: v3(2945,2605) 2957.2,2592.8 U4.6
  Top Layer w12: v2(2510,3610) 2510,3670 2674.41,3834.41 U12.4
  Bottom Layer w10: 2943.5,2740 2945.5,2738 2945.5,2605.5 v3(2945,2605)
  Bottom Layer w12: v2(2510,3610) 2508,3608 2508,3513.51 2942.5,3079.01 2942.5,2740
MISO: P5.1 U4.22 | length 357.5
  Top Layer w7: U4.22 3272.17,2337.83 P5.1
MOSI: P5.4 U4.21 | length 481.6
  Top Layer w7: U4.21 3252.48,2476.13 3255,2473.61 3255,2320 3335,2240 3335,2165 P5.4
  Top Layer w12: P5.4 P5.4@3310,2120
MOT1_A: U4.23 U5.3 | length 3169
  Top Layer w10: U4.23 3291.85,2488.15 3315,2465 3485,2465 v3(3505,2445)
  Top Layer w12: v3(3820,3215) 4285,3215 4535,3465 5305,3465 5385,3545 5385,3655 5318.31,3721.69 U5.3
  Bottom Layer w12: v3(3505,2445) 3570,2445 3820,2695 v3(3820,3215)
MOT1_B: U4.24 U5.19 | length 2365.8
  Top Layer w7: U4.24 3311.54,2493.46 3318.27,2486.73 3501.73,2486.73 v3(3505,2490)
  Top Layer w12: v3(3795,3345) 4245,3345 4473,3573 4668,3573 4680,3585 4680,3640 4711.69,3671.69 U5.19
  Bottom Layer w12: v3(3505,2490) 3580,2490 3788.5,2698.5 3788.5,3332 v3@3795,3338.5
MOT1_EN: U4.53 U5.20 | length 1709.8
  Top Layer w10: U4.53 3291.85,3200.83 3346.02,3255
  Top Layer w12: 3346.02,3255 3401.02,3310 4275,3310 4510,3545 4671.1,3545 U5.20
MOT1_ENCA: P1.3 U6.3 | length 231.4
  Top Layer w12: U6.3@4876.13,4311.01 U6.3 4874.41,4339.41 P1.3
MOT1_ENCB: P1.4 U6.1 | length 257.7
  Top Layer w12: U6.1 4954.29,4309.29 5095,4450 P1.4
MOT1_FB: C18.2 R6.2 U4.96 U5.8 | length 4358.4
  Top Layer w10: U4.96 2882.52,2667.52
  Top Layer w12: 2882.52,2667.52 3150,2935 v2(3295,2935) ; v3(3450,3040) 3450,3080 3545,3175 5155,3175 5285,3305 v5@5295,3305 ; C18.2@5120,4209.88 5182.44,4209.88 R6.2@5209.16,4236.6 ; U5.8 5223.31,3971.69 5209.16,3985.84 R6.2@5209.16,4236.6 ; v5(5275,4145) 5275,4182.44 5215,4242.44 5209.16,4242.44 R6.2@5209.16,4236.6 ; v5@5300,3290 v5(5300,3300)
  Bottom Layer w12: v2(3295,2935) 3335,2935 v3@3450,3050 ; v5(5275,4145) 5365,4145 5420,4090 5420,3495 5315,3390 5315,3305 5310,3300 v5(5300,3300)
MOT1_FS: U4.52 U5.2 | length 2208.5
  Top Layer w10: U4.52 3311.54,3166.54
  Top Layer w12: 3311.54,3166.54 3430,3285 4290,3285 4491.77,3486.77 5066.77,3486.77 5251.69,3671.69 U5.2
MOT1_OUT1: P1.1 U5.14 U5.15 | length 776.1
  Top Layer w20: U5.15 4801.69,3871.69 4830,3900 4830,3945 4806.69,3921.69 U5.14
  Top Layer w40: 4830,3945 4830,4435 P1.1@4855,4460
  Top Layer w50: P1.1@4855,4460 P1.1
MOT1_OUT2: P1.2 U5.6 U5.7 | length 1133.9
  Top Layer w20: U5.6 5306.69,3871.69 5337.5,3902.5 5337.5,3942.5 5316.69,3921.69 U5.7
  Top Layer w40: v4(5321.87,4321.87) 5410,4233.73 5410,4015 5337.5,3942.5
  Bottom Layer w40: P1.2@4935,4482.02 P1.2 4935,4477.98 4990.98,4422 5268,4422 5321.87,4368.13 v4(5321.87,4321.87)
MOT1_TRI_EN: U4.55 U5.13 | length 1980.4
  Top Layer w10: U4.55 3252.48,3202.94
  Top Layer w12: 3252.48,3202.94 3418.04,3368.5 3773.95,3368.5 3781.95,3376.5 4171.5,3376.5 4490,3695 4565,3695 4630,3760 4630,3905 4695,3970 4746.1,3970 U5.13
MOT2_A: U4.25 U7.3 | length 2149.6
  Top Layer w10: U4.25 3337.48,2535 v3(3505,2535)
  Top Layer w12: v3(3775,3415) 4170,3415 4330,3575 4330,3785 4305,3810 U7.3
  Bottom Layer w12: v3(3505,2535) 3595,2535 3731.5,2671.5 3731.5,3381.5 3765,3415 v3(3775,3415)
MOT2_B: U4.26 U7.19 | length 1577.2
  Top Layer w10: U4.26 v3@3496.22,2588.78
  Top Layer w12: v3@3496.22,2588.78 v3(3505,2580) ; v2(3655,3460) 3655,3495 3800,3640 3800,3750 3790,3760 U7.19
  Bottom Layer w12: v3(3505,2580) 3602.83,2580 3700,2677.17 3700,3195 3655,3240 v2(3655,3460)
MOT2_EN: U4.58 U7.20 | length 908.4
  Top Layer w10: U4.58 3193.43,3253.43 3217,3277
  Top Layer w12: 3217,3277 3295,3355 3296.57,3355 3391.57,3450 3555,3450 3731.14,3626.14 3731.14,3641.59 3731.5,3641.95 3731.5,3668.05 3731.14,3668.41 U7.20
MOT2_ENCA: P2.3 U8.3 | length 231
  Top Layer w12: P2.3 4455,4375 4515,4375 4558.5,4331.5 4558.5,4315.2 U8.3@4569.41,4304.29
MOT2_ENCB: P2.4 U8.1 | length 234.5
  Top Layer w12: P2.4 4488.28,4430 4548.28,4370 4600,4370 4621.5,4348.5 U8.1@4621.5,4289.29
MOT2_FB: C22.2 R7.2 U4.95 U7.8 | length 2795.7
  Top Layer w10: U4.95 2845.49,2687.2
  Top Layer w12: 2845.49,2687.2 3113.28,2955 3230,2955 3490,3215 v2(3600,3215) ; v3(3605,3420) 3660,3420 3720,3480 4140,3480 v2(4230,3570) ; U7.8 4340,4060 4340,4102.01 C22.2 ; C22.2@4405,4174.88 4427.44,4174.88 4471.06,4218.5 R7.2
  Bottom Layer w12: v2(3600,3215) 3600,3425 v3(3605,3420) ; v2(4230,3570) 4300,3640 4300,4025 4335,4060 v2(4335,4065)
MOT2_FS: U4.57 U7.2 | length 1570.1
  Top Layer w10: U4.57 3213.11,3162.64
  Top Layer w12: 3213.11,3162.64 3213.11,3228.11 3373.5,3388.5 3668.5,3388.5 3730,3450 4165,3450 4310,3595 4310,3740 4290,3760 U7.2
MOT2_OUT1: P2.1 U7.14 U7.15 | length 940.8
  Top Layer w20: U7.15 3790,3960 3815,3985 3815,4055 3770,4010 U7.14
  Top Layer w50: 3815,4055 3815,4215 3900,4300 4110,4300 P2.1
MOT2_OUT2: P2.2 U7.6 U7.7 | length 700.3
  Top Layer w12: P2.2@4320,4427.37 P2.2
  Top Layer w20: U7.6 4190,3960 4165,3985 4190,4010 U7.7
  Top Layer w50: 4165,3985 4165,4210 4320,4365 P2.2
MOT2_TRI_EN: U4.60 U7.13 | length 1312.1
  Top Layer w10: U4.60 3154.06,3179.95
  Top Layer w12: 3154.06,3179.95 3174.43,3200.32 3174.43,3264.43 3390,3480 3525,3480 3655,3610 v2(3655,3660) ; v3(3660,4035) 3685,4060 U7.13
  Bottom Layer w12: v2(3655,3660) 3655,3754.85 3694,3793.85 3694,4001 v3(3660,4035)
MOT3_A: U4.39 U9.3 | length 1292.6
  Top Layer w10: U4.39 3477.82,2844.69 3505.5,2872.37 3505.5,2895.5 v3(3540,2930)
  Top Layer w12: v2(3225,3385) 3260,3385 3425,3550 3425,3720 3410,3735 U9.3
  Bottom Layer w12: v2(3225,3385) 3240,3385 3540,3085 v3(3540,2930)
MOT3_B: U4.38 U9.19 | length 1695.2
  Top Layer w7: 3570.5,2911.91 3570.5,3024.76 3610.74,3065 v3(3635,3065)
  Top Layer w10: U4.38 3483.59,2825 3570.5,2911.91
  Top Layer w12: v2(2790,3455) 2790,3665 2810,3685 U9.19
  Bottom Layer w12: v2(2790,3455) 2821.5,3423.5 3238.98,3423.5 3597.48,3065 v3(3635,3065)
MOT3_EN: U4.70 U9.20 | length 557.7
  Top Layer w10: U4.70 2957.2,3212.8
  Top Layer w12: U9.20 2851.14,3318.86 2957.2,3212.8
MOT3_ENCA: P3.3 U10.3 | length 177.5
  Top Layer w12: U10.3 3066.13,4331.01 3066.13,4406.13 3105,4445 P3.3
MOT3_ENCB: P3.4 U10.1 | length 189.6
  Top Layer w12: U10.1 3185.3,4399 P3.4@3185.3,4490
MOT3_FB: C26.2 R8.2 U4.94 U9.8 | length 1927.2
  Top Layer w10: U4.94 2836.89,2706.89 2875,2745
  Top Layer w12: 2875,2745 3045,2915 v2(3045,3015) ; v2(3025,3210) 3040,3225 3040,3332.83 3294.5,3587.34 3294.5,3964.5 3315,3985 ; C26.2@3275,4219.88 3300,4194.88 ; U9.8 3315,3985 ; R8.2 3336.38,4194.88 3300,4194.88 ; 3300,4194.88 3300,4000 3315,3985
  Bottom Layer w12: v2(3025,3210) 3030,3205 3030,3065 3045,3050 v2(3045,3015)
MOT3_FS: U4.64 U9.2 | length 713.7
  Top Layer w10: U4.64 3075.31,3165.14
  Top Layer w12: 3075.31,3165.14 3068.5,3171.95 3068.5,3333.05 3314.5,3579.05 3314.5,3669.5 3330,3685 U9.2
MOT3_OUT1: P3.1 U9.14 U9.15 | length 749.2
  Top Layer w15: U9.15 2900,3885 2920,3905 2920,3953.86 2901.14,3935 U9.14
  Top Layer w40: 2920,3953.86 2920,4465 P3.1
MOT3_OUT2: P3.2 U9.6 U9.7 | length 1209.3
  Top Layer w12: U9.6 3400,3885 3445,3930 3445,3960 3420,3935 U9.7
  Top Layer w40: v5(3425.21,4495.21) 3445,4475.43 3445,3960
  Bottom Layer w40: P3.2@3023.99,4491.01 3087.98,4555 3110,4555
  Bottom Layer w50: 3110,4555 3369.1,4555 3425.21,4498.88 v5(3425.21,4495.21)
MOT3_TRI_EN: U4.72 U9.13 | length 1136.4
  Top Layer w10: U4.72 2917.83,3157.17
  Top Layer w12: U9.13 2795,3985 2750,3940 2750,3846.72 2595,3691.72 2595,3480 2917.83,3157.17
MOT4_A: U4.18 U11.3 | length 2853.5
  Top Layer w10: U4.18 3193.43,2467.57 v3(3211,2450)
  Top Layer w12: U11.3 2340,3750 v2(2410,3680)
  Bottom Layer w12: v2(2410,3680) 2413,3683 2562,3683 2680,3565 2680,3500.85 2777.35,3403.5 3161.5,3403.5 3508.5,3056.5 3508.5,2851.5 3580,2780 3630,2780 3679.77,2730.23 3679.77,2688.06 3611.72,2620 3485,2620 3440,2575 v2(3440,2430) 3226,2430 v3@3211,2445
MOT4_B: U4.40 U11.19 | length 2938.5
  Top Layer w10: U4.40 3454.37,2864.37 v3(3475,2885)
  Top Layer w12: U11.19 1645,3700 1630,3685 1630,3505 1745,3390 v2(2395,3390)
  Bottom Layer w12: v2(2395,3390) 2425,3420 2425,3645 2440,3660 2550,3660 2655,3555 2655,3495 2766.5,3383.5 3152.61,3383.5 3485,3051.11 3485,2895 v3(3475,2885)
MOT4_EN: U4.75 U11.20 | length 1489
  Top Layer w12: U11.20 1686.14,3483.86 1740,3430 2550.04,3430 U4.75
MOT4_ENCA: P4.3 U12.3 | length 240.2
  Top Layer w12: P4.3@2505,4420.71 P4.3 2630.71,4314.29 2660.71,4314.29 U12.3@2670,4305
MOT4_ENCB: P4.4 U12.1 | length 219.1
  Top Layer w12: P4.4 2645,4380 2705,4380 2725.59,4359.41 U12.1@2725.59,4314.29
MOT4_FB: C30.2 R9.2 U4.97 U11.8 | length 2558.2
  Top Layer w10: U4.97 2912.17,2647.83 v3(2915,2645)
  Top Layer w12: U11.8 2250,4000 ; v2(2460,3610) 2460,3648.28 2635,3823.28 2635,3930 2605,3960 2290,3960 2250,4000 ; R9.2@2535,4262.44 2452.56,4180 2360,4180 2285,4105 2285,4035 2250,4000
  Bottom Layer w12: v2(2460,3610) 2460,3533.23 2912,3081.23 2912,2648 v3(2915,2645)
MOT4_FS: U4.74 U11.2 | length 932.6
  Top Layer w10: U11.2 2305,3700 2460,3545 2485.97,3545 2878.46,3152.51 U4.74
MOT4_OUT1: P4.1 U11.14 U11.15 | length 1163.8
  Top Layer w12: U11.14@1691.14,3945 U11.14@1720,3945
  Top Layer w20: U11.15 1735,3900 1760,3925 1760,3985 1725,3950 U11.14
  Top Layer w50: 1760,3985 1760,4205 1995,4440 P4.1
MOT4_OUT2: P4.2 U11.6 U11.7 | length 750.5
  Top Layer w12: P4.2@2425,4437.37 P4.2
  Top Layer w25: 2125,3985 2160,3950 U11.7 U11.6
  Top Layer w40: 2125,3985 2125,4163.49 2324.21,4362.7 2367.3,4362.7 2384.6,4380 2425,4420.4 P4.2
MOT4_TRI_EN: U4.77 U11.13 | length 2068
  Top Layer w12: U11.13 1600,4000 1565,3965 1565,3530 1740,3355 2560,3355 2755,3160 2755,3055.44 2768.9,3041.54 U4.77
NetC4_1: C4.1 U2.2 | length 94.2
  Top Layer w10: U2.2 2128.19,2665.31
  Top Layer w12: 2128.19,2665.31 C4.1
NetC4_2: C4.2 D2.1 L1.2 U2.3 | length 397.7
  Top Layer w10: U2.3 2171.5,2685
  Top Layer w20: 2171.5,2685 C4.2
  Top Layer w50: C4.2 2310,2645 D2.1@2340,2675
  Top Layer w80: L1.2@2325,2538.66 D2.1@2325,2630
NetC6_2: C6.2 R2.1 | length 88.5
  Top Layer w20: C6.2@1758.5,2571.5 R2.1
NetC10_2: C10.2 U4.33 Y1.1 | length 481.5
  Top Layer w10: U4.33 3435,2726.57
  Top Layer w12: 3426.75,2726.57 3461.57,2726.57 3500.21,2765.21 3644.21,2765.21 Y1.1 3736.5,2833.5 3785.43,2784.57 C10.2
NetC11_2: C11.2 U4.34 Y1.3 | length 571
  Top Layer w10: U4.34 3436.26,2746.26 3565,2875 3617.5,2927.5 Y1.3
  Top Layer w12: Y1.3 3664,2950 3785.43,2950 C11.2
NetC21_2: C21.2 U5.17 | length 288.5
  Top Layer w12: C21.2 4535,3635 4671.69,3771.69 U5.17
NetC25_2: C25.2 U7.17 | length 391.2
  Top Layer w20: U7.17 3775,3860 3825,3810 3825,3630 3784.88,3589.88 C25.2
NetC29_2: C29.2 U9.17 | length 156.4
  Top Layer w12: C29.2 2780.94,3785 U9.17
NetC33_2: C33.2 U11.17 | length 379.5
  Top Layer w12: U11.17 1730,3800 1779.88,3750.12 C33.2
NetD1_2: D1.2 R1.1 U1.3 | length 409.9
  Top Layer w12: U1.3 4638.82,2476.18 4745,2370 4745,2330 4906.5,2330 R1.1
NetD3_1: D3.1 R20.2 | length 62
  Top Layer w10: D3.1 R20.2
NetD4_1: D4.1 R21.2 | length 62
  Top Layer w10: D4.1 R21.2
NetD5_1: D5.1 R22.2 | length 62
  Top Layer w10: D5.1 R22.2
NetD6_1: D6.1 R23.2 | length 62
  Top Layer w10: D6.1 R23.2
NetD7_1: D7.1 R24.2 | length 100.2
  Top Layer w10: R24.2 2885,2130 2900,2115 D7.1@2900,2068.46
NetR2_2: R2.2 U2.9 | length 72.3
  Top Layer w10: R2.2@1825,2665 U2.9
NetR3_2: R3.2 R4.1 U2.8 | length 183.2
  Top Layer w10: 1866.5,2685 U2.8
  Top Layer w12: R4.1@1820.43,2815 1820.43,2738.94 R3.2 1866.5,2685
NetR5_1: R5.1 U2.10 | length 93.6
  Top Layer w30: R5.1@1845,2565.43 1897.32,2617.76 1897.32,2637.32
NetR20_1: R20.1 U4.93 | length 827.3
  Top Layer w10: R20.1 2425,2220 2562,2357 2562,2622 2666.57,2726.57 U4.93
NetR21_1: R21.1 U4.92 | length 877.3
  Top Layer w10: R21.1 2360,2180.46 2544,2364.46 2544,2629.46 2660.8,2746.26 U4.92
NetR22_1: R22.1 U4.91 | length 927.3
  Top Layer w10: R22.1 2295,2150 2515,2370 2515,2625.91 2655.03,2765.94 U4.91
NetR23_1: R23.1 U4.90 | length 982.3
  Top Layer w10: R23.1 2490,2391.5 2490,2635 2640.63,2785.63 U4.90
PWM1: P6.1 U4.15 | length 906.7
  Top Layer w10: v3(3045,2295) 3045,2340 3134.37,2429.37 U4.15
  Top Layer w12: P6.1 P6.1@3595,2210
  Bottom Layer w12: v3(3045,2295) 3045,2280 3155,2170 3555,2170 3580,2195 P6.1
PWM2: P7.1 U4.16 | length 996.5
  Top Layer w10: v3(3100,2295) 3100,2345 3154.06,2399.06 U4.16
  Top Layer w12: P7.1@3740,2202.44 P7.1
  Bottom Layer w12: v3(3100,2295) 3110.45,2295 3141.95,2263.5 3171.94,2263.5 ; 3171.97,2263.53 3736.47,2263.53 3750,2250 P7.1
PWM3: P8.1 U4.17 | length 1055.4
  Top Layer w10: v3(3155,2295) 3173.74,2313.74 U4.17
  Top Layer w12: P8.1@3895,2205 P8.1
  Bottom Layer w12: v3(3155,2295) 3165,2305 3795,2305 P8.1
RESET: C9.1 P5.5 S1.3 S1.4 U4.30 | length 1199.6
  Top Layer w10: v3(3235,2600) 3260,2600 3327.52,2667.52 U4.30 3462.48,2667.52 3551.42,2578.58 S1.3@3583.5,2578.58
  Top Layer w12: P5.5 3205,2235 v3(3205,2400) ; S1.4@3583.5,2401.42 3583.5,2578.58 3623.15,2578.58 3709.57,2665 C9.1@3732.44,2665
  Bottom Layer w10: v3(3205,2400) 3180,2425 3180,2545 v3(3235,2600)
  Bottom Layer w12: v3@3230,2600 v3(3235,2600)
RX0: U1.2 U4.2 | length 2489.3
  Top Layer w10: v2@2878.46,2416.54 U4.2
  Top Layer w12: v2@2878.46,2416.54 v2(2880,2415)
  Bottom Layer w12: v2(2880,2415) 2926.5,2368.5 3218.05,2368.5 3219.55,2370 4140,2370 4515,1995 4550,1995 4614,2059 4614,2436 U1.2@4570,2480
SCK: P5.3 U4.20 | length 332.4
  Top Layer w7: U4.20 3232.8,2474.61 3240,2467.4 3240,2270 P5.3
TX0: D1.1 U4.3 | length 2278.8
  Top Layer w12: U4.3 2898.15,2451.03 2925,2426.04 v2(2925,2330) ; v5(4360,1965) 4355,1970 4695,1970 D1.1
  Bottom Layer w12: v2(2925,2330) 4105,2330 4360,2075 v5(4360,1965)
VBATT: C2.1 C3.2 C20.1 C24.1 C28.1 P9.1 P10.1 U2.4 U2.5 U5.4 U5.5 U5.16 U7.4 U7.5 U7.16 U9.4 U9.5 U9.16 U11.4 U11.5 U11.16 | length 9256.6
  Top Layer w10: U2.4 2109.68,2704.68 2125,2720 2125,2745 2104.37,2724.37 U2.5
  Top Layer w15: v2(2780,3830) 2785,3835 U9.16 ; U9.4 3487.64,3785 v8(3507.64,3805) 3477.64,3835 U9.5
  Top Layer w20: v4(1610,3850) U11.16 ; U11.4 2389.09,3800 C28.1 ; U11.5 C28.1@2400.91,3850 ; U7.4 4409.09,3860 ; U7.5 4365,3910 4459.09,3815.91 C20.1 ; v9@4673.31,3821.69 U5.16
  Top Layer w25: C28.1@2400.91,3850 C28.1 ; C24.1@3580.91,3910 U7.16 ; v9(4670,3825) v9@4673.31,3821.69 ; U5.4 5336.69,3771.69 v6(5360,3795) 5350,3795 5323.31,3821.69 U5.5
  Top Layer w30: C24.1 C24.1@3580.91,3910
  Top Layer w40: 2125,2745 2125,2959.09 C2.1 2154.53,3030.43 C3.2 2205,3130.63 P10.1
  Top Layer w75: C28.1 2424.09,3835 v8(2565,3835) ; v8(3507.64,3805) 3507.64,3858.55 C24.1 ; v6(4435,3715) 4435,3730.91 C20.1
  Bottom Layer w40: v6(4435,3715) 4545,3825 v9(4670,3825)
  Bottom Layer w75: v4@1610.3,3850 1539.5,3779.2 1539.5,3385.5 1749.37,3175.63 P9.1 P10.1@2160,3175.63 ; P10.1@2170,3175 2200,3175 2310,3285 2310,3710 2435,3835 v8(2565,3835) 2755,3835 2805,3785 2805,3545 2875,3475 3440,3475 3507.64,3542.64 ; v8(3507.64,3805) 3507.64,3542.64 ; v6(4435,3715) 4435,3570 4315,3450 ; v6(5360,3795) 5360,3735 5075,3450 4315,3450 ; 3507.64,3542.64 3508,3543 3792,3543 3885,3450 4315,3450
pads on no net: U1.4 U1.5 U1.6 U1.7 U1.8 U1.9 U1.11 U1.12 U1.13 U1.14 U1.15 U1.16 U1.17 U1.18 U1.19 U1.20 U2.7 U4.1 U4.4 U4.5 U4.12 U4.13 U4.14 U4.19 U4.27 U4.28 U4.29 U4.35 U4.36 U4.37 U4.41 U4.42 U4.47 U4.48 U4.49 U4.50 U4.51 U4.54 U4.56 U4.59 U4.63 U4.65 U4.66 U4.67 U4.68 U4.69 U4.71 U4.73 U4.76 U4.78 U4.79 U4.82 U4.83 U4.84 U4.85 U4.86 U4.87 U4.88 U4.89 Y1.2 Y1.4
copper on no net: | length 2671.6
  Top Layer w10: 1781.3,2100 ccw(c1675,2100) 1781.3,2100 ; 1781.3,4525 ccw(c1675,4525) 1781.3,4525 ; 5666.3,2100 ccw(c5560,2100) 5666.3,2100 ; 5666.3,4525 ccw(c5560,4525) 5666.3,4525

## Polygon pours and split planes (outlines as drawn)
GND on Bottom Layer "Bottom Layer-GND" (solid, remove dead copper, shelved, pour order 2): 1465,4730 1465,1830 5720,1830 5720,4730

## Keep-outs
Bottom Layer:
  lines w10: 1435,4760 5750,4760 5755,4755 5755,1805 1440,1805 1440,4755 1435,4760

## Other copper
Top Layer:
  text "Christian Laney" at 4900,2040 h30
  text "Jim Higgins" at 4905,1995 h30
  text "christian.m.laney@gmail.com" at 4905,1945 h30

## Silkscreen, mask and mechanical layers (free items; w line width, h text height)
Top Overlay:
  lines w10: 4175,2710 4460,2425 5480,2425 5480,3390 5475,3395 4425,3395 4175,3145 4175,2710
  text "M3" at 3410,4690 h60 r180
  text "M2" at 4275,4690 h60 r180
  text "M4" at 2385,4675 h60 r180
  text "M1" at 5455,4625 h60 r180
  text "6V-36V" at 1500,3365 h60 r270
  text "5V" at 2540,1905 h60

## Text inside footprints (layer, text, board x,y; h text height)
P5: Top Overlay "1" at 3460,2240 h30 r180; Top Overlay "2" at 3470,2135 h30 r180; Top Overlay "5" at 3130,2240 h30 r180; Top Overlay "6" at 3130,2140 h30 r180